# EAGLE board nes_adapter (EAGLE 7.6.0)
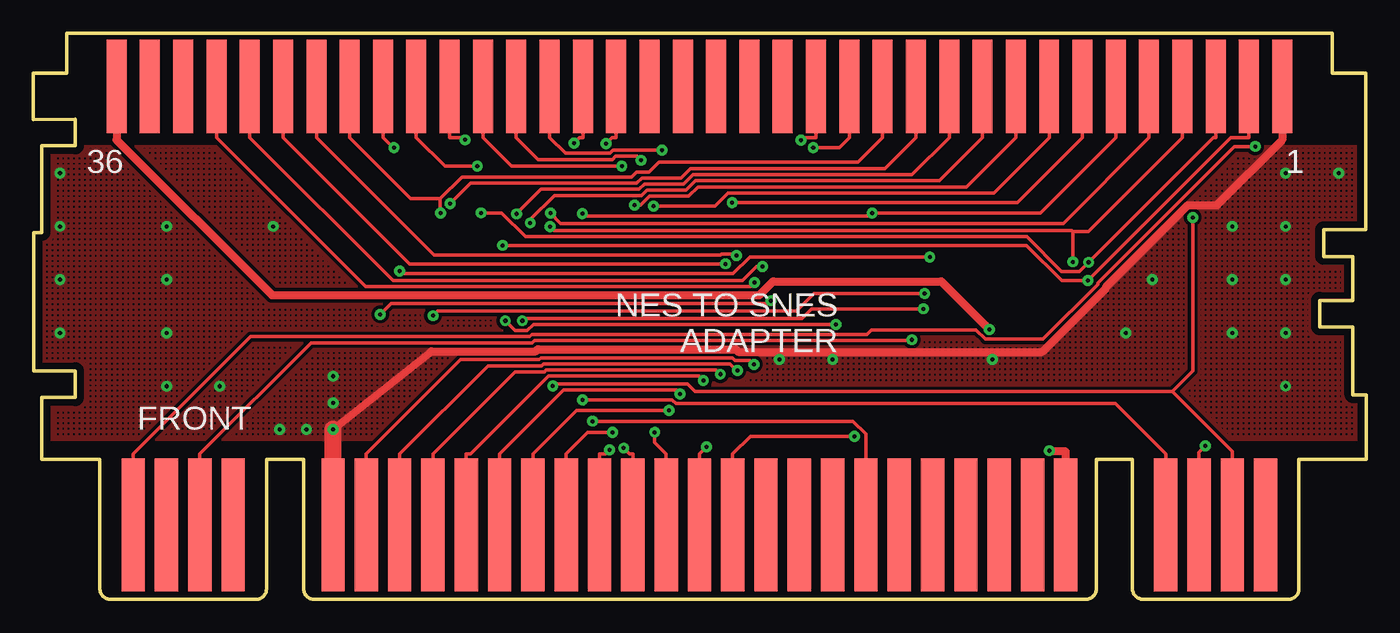
[diagram p0: board, top side]
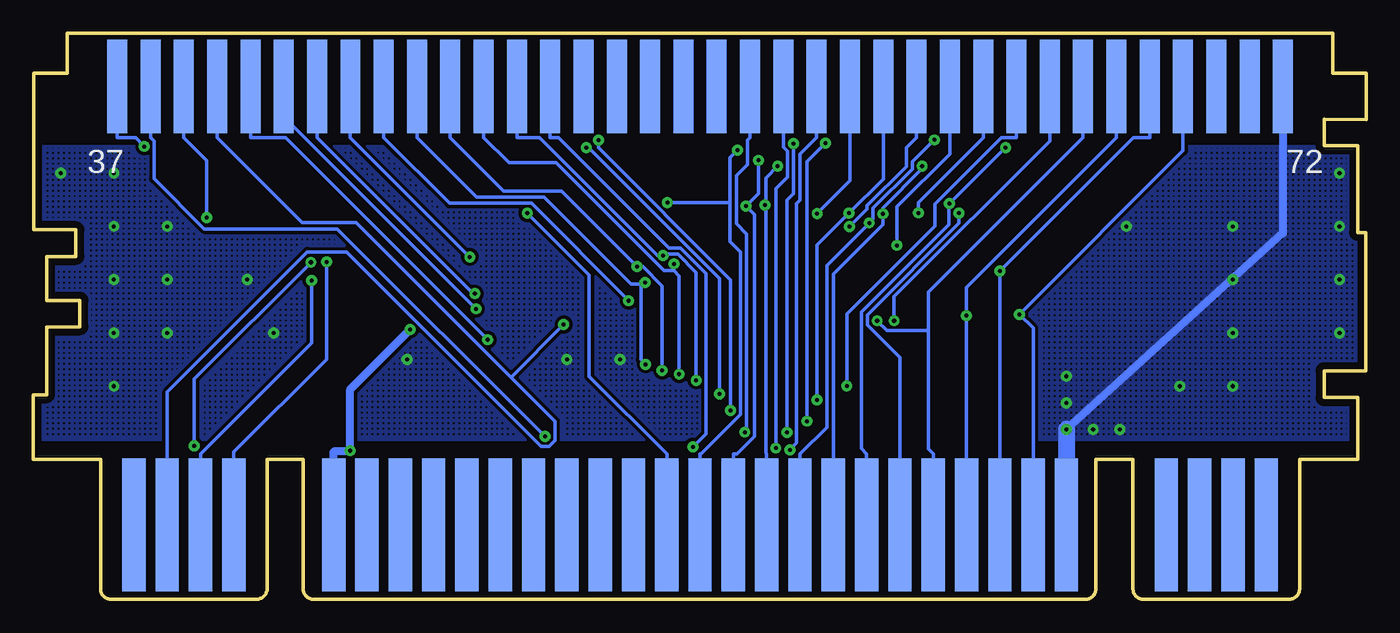
[diagram p1: board, bottom side, seen from below]

Size 100.05 x 42.5 mm. Coordinates in mm from the lower left corner, seen from the top.
Outline: 5,0.75 arc90 5.8,0 16.8,0 arc90 17.5,0.8 17.5,10.5 20.3,10.5 20.3,0.8 arc90 21,0 79,0 arc90 79.8,0.8 79.8,10.5 82.5,10.5 82.5,0.8 arc90 83.3,0 94.2,0 arc90 95,0.75 95,10.5 100.05,10.5 100.05,15.35 99.05,15.35 99.05,20.45 96.55,20.45 96.55,22.45 99.05,22.45 99.05,25.75 96.85,25.75 96.85,27.75 100,27.75 100,39.5 97.5,39.5 97.5,42.5 2.5,42.5 2.5,39.5 0,39.5 0,36 3.15,36.05 3.15,34.05 0.65,34.05 0.65,27.55 0.05,27.55 0.05,17.15 3.15,17.15 3.15,15.15 0.65,15.15 0.65,10.5 5,10.5 5,0.75
Copper layers (1*16): Top 0.035mm / dielectric 1.5mm / Bottom 0.035mm
Design rules "SparkFun_small": minimum track width 8mil, minimum drill 12mil, track to track 8mil, track to pad 8mil, pad to pad 8mil, via to via 8mil, smd to smd 8mil, copper to edge 20mil, drill to drill 12mil, minimum pad ring 12mil, minimum via ring 10mil, stop-mask expansion 4mil, vias tented up to drill 25mil, thermal gap 10mil
Net classes: 0 default: width 0.254 mm, drill 0.305 mm, clearance 0.203 mm; 1 power: width 0.61 mm, drill 0.406 mm, clearance 0.203 mm; 2 gnd: width 0.61 mm, drill 0.406 mm, clearance 0.203 mm; 3 power usb: width 0.61 mm, drill 0.406 mm, clearance 0.203 mm

## Footprints (pad centres in the part's own frame; a part is rotated, then mirrored left to right if it is on the bottom)
CART-EXP-PINS-LONG = smd 1.75 x 10 bottom: 1 42.5,-1.42; 2 40,-1.42; 3 37.5,-1.42; 4 35,-1.42; 5 27.5,-1.42; 6 25,-1.42; 7 22.5,-1.42; 8 20,-1.42; 9 17.5,-1.42; 10 15,-1.42; 11 12.5,-1.42; 12 10,-1.42; 13 7.5,-1.42; 14 5,-1.42; 15 2.5,-1.42; 16 0,-1.42; 17 -2.5,-1.42; 18 -5,-1.42; 19 -7.5,-1.42; 20 -10,-1.42; 21 -12.5,-1.42; 22 -15,-1.42; 23 -17.5,-1.42; 24 -20,-1.42; 25 -22.5,-1.42; 26 -25,-1.42; 27 -27.5,-1.42; 28 -35,-1.42; 29 -37.5,-1.42; 30 -40,-1.42; 31 -42.5,-1.42 | smd 1.75 x 10: 32 42.5,-1.42; 33 40,-1.42; 34 37.5,-1.42; 35 35,-1.42; 36 27.5,-1.42; 37 25,-1.42; 38 22.5,-1.42; 39 20,-1.42; 40 17.5,-1.42; 41 15,-1.42; 42 12.5,-1.42; 43 10,-1.42; 44 7.5,-1.42; 45 5,-1.42; 46 2.5,-1.42; 47 0,-1.42; 48 -2.5,-1.42; 49 -5,-1.42; 50 -7.5,-1.42; 51 -10,-1.42; 52 -12.5,-1.42; 53 -15,-1.42; 54 -17.5,-1.42; 55 -20,-1.42; 56 -22.5,-1.42; 57 -25,-1.42; 58 -27.5,-1.42; 59 -35,-1.42; 60 -37.5,-1.42; 61 -40,-1.42; 62 -42.5,-1.42
NES_PINS = smd 1.5 x 7: P1 43.75,-0.5; P2 41.25,-0.5; P3 38.75,-0.5; P4 36.25,-0.5; P5 33.75,-0.5; P6 31.25,-0.5; P7 28.75,-0.5; P8 26.25,-0.5; P9 23.75,-0.5; P10 21.25,-0.5; P11 18.75,-0.5; P12 16.25,-0.5; P13 13.75,-0.5; P14 11.25,-0.5; P15 8.75,-0.5; P16 6.25,-0.5; P17 3.75,-0.5; P18 1.25,-0.5; P19 -1.25,-0.5; P20 -3.75,-0.5; P21 -6.25,-0.5; P22 -8.75,-0.5; P23 -11.25,-0.5; P24 -13.75,-0.5; P25 -16.25,-0.5; P26 -18.75,-0.5; P27 -21.25,-0.5; P28 -23.75,-0.5; P29 -26.25,-0.5; P30 -28.75,-0.5; P31 -31.25,-0.5; P32 -33.75,-0.5; P33 -36.25,-0.5; P34 -38.75,-0.5; P35 -41.25,-0.5; P36 -43.75,-0.5 | smd 1.5 x 7 bottom: P37 43.75,-0.5; P38 41.25,-0.5; P39 38.75,-0.5; P40 36.25,-0.5; P41 33.75,-0.5; P42 31.25,-0.5; P43 28.75,-0.5; P44 26.25,-0.5; P45 23.75,-0.5; P46 21.25,-0.5; P47 18.75,-0.5; P48 16.25,-0.5; P49 13.75,-0.5; P50 11.25,-0.5; P51 8.75,-0.5; P52 6.25,-0.5; P53 3.75,-0.5; P54 1.25,-0.5; P55 -1.25,-0.5; P56 -3.75,-0.5; P57 -6.25,-0.5; P58 -8.75,-0.5; P59 -11.25,-0.5; P60 -13.75,-0.5; P61 -16.25,-0.5; P62 -18.75,-0.5; P63 -21.25,-0.5; P64 -23.75,-0.5; P65 -26.25,-0.5; P66 -28.75,-0.5; P67 -31.25,-0.5; P68 -33.75,-0.5; P69 -36.25,-0.5; P70 -38.75,-0.5; P71 -41.25,-0.5; P72 -43.75,-0.5

## Placement (x,y rotation side)
U$1  CART-EXP-EDGE  [CART-EXP-PINS-LONG]  50,7 0 bottom
U$2  NES-CART_PINS  [NES_PINS]  50,39 0 top

## Library data of the parts
U$1 = snes_cart_mod4
U$2 = !sanni_mod4

## Nets
!CHR_A13: U$1.13 U$2.P58
A0: U$1.41 U$2.P13 U$2.P29
A1: U$1.42 U$2.P12 U$2.P28
A2: U$1.43 U$2.P11 U$2.P27
A3: U$1.44 U$2.P10 U$2.P26
A4: U$1.45 U$2.P9 U$2.P25
A5: U$1.46 U$2.P8 U$2.P24
A6: U$1.47 U$2.P7 U$2.P23
A7: U$1.48 U$2.P6 U$2.P59
A8: U$1.28 U$2.P5 U$2.P60
A9: U$1.59 U$2.P4 U$2.P61
A10: U$1.29 U$2.P3 U$2.P63
A11: U$1.60 U$2.P2 U$2.P62
A12: U$1.30 U$2.P39 U$2.P64
A13: U$1.61 U$2.P40 U$2.P65
A14: U$1.3 U$2.P41
CHR_RD: U$1.12 U$2.P21
CHR_WR: U$1.15 U$2.P56
CIRAM_A10: U$1.21 U$2.P22
CIRAM_CE: U$1.14 U$2.P57
CLK: U$1.1 U$2.P37
D0: U$1.9 U$2.P30 U$2.P49
D1: U$1.8 U$2.P31 U$2.P48
D2: U$1.7 U$2.P32 U$2.P47
D3: U$1.6 U$2.P33 U$2.P46
D4: U$1.37 U$2.P45 U$2.P69
D5: U$1.38 U$2.P44 U$2.P68
D6: U$1.39 U$2.P43 U$2.P67
D7: U$1.40 U$2.P42 U$2.P66
GND [gnd]: U$1.5 U$1.36 U$2.P1 U$2.P72
IRQ: U$1.11 U$2.P15
M2: U$1.17 U$2.P38
PRG_CE: U$1.16 U$2.P50
PRG_RW: U$1.10 U$2.P14
VCC [power]: U$1.27 U$1.58 U$2.P36

## Tracks (layer width: path | path; a pad name or v marks a point on that pad's centre or on a via)
!CHR_A13  (via drill 0.3 pad 0.81)
  Top 0.254: U$1.13 42.5,10.91 42.95,10.91 v43.27,11.22
  Bottom 0.254: v43.27,11.22 42.75,11.74 42.75,29.73 42.5,29.98 42.5,33.42 41.25,34.67 U$2.P58
A0  (via drill 0.3 pad 0.81)
  Top 0.254: U$2.P29 23.75,34.67 28.34,30.08 30.55,30.08 | 30.55,30.08 32.17,31.7 44.9,31.7 45.29,32.09 46.22,32.09 46.96,32.83 61.91,32.83 63.75,34.67 U$2.P13 | 30.55,30.08 30.55,29.01 v30.56,29
  Bottom 0.254: U$1.41 35,18.16 37.44,20.61 37.44,21.36 30.56,28.25 v30.56,29 | v30.56,29
A1  (via drill 0.3 pad 0.81)
  Top 0.254: v31.29,29.71 32.82,31.24 45.29,31.24 45.68,31.63 48.62,31.63 49.34,32.34 63.92,32.34 66.25,34.67 U$2.P12 | v27.07,33.91 27,33.91 26.25,34.67 U$2.P28
  Bottom 0.254: v27.07,33.91 31.27,29.71 v31.29,29.71 31.31,29.69 31.31,28.15 37.9,21.55 37.9,11.31 37.5,10.91 U$1.42
A2  (via drill 0.3 pad 0.81)
  Top 0.254: U$2.P27 28.75,34.67 30.9,32.52 v33.33,32.52 | v36.27,28.94 38.11,30.79 45.48,30.79 45.87,31.17 48.81,31.17 49.52,31.88 65.96,31.88 68.75,34.67 U$2.P11
  Bottom 0.254: v33.33,32.52 33.33,32.32 36.27,29.38 v36.27,28.94 36.27,28.14 40,24.41 40,10.91 U$1.43
A3  (via drill 0.3 pad 0.81)
  Top 0.254: v37.3,28.26 37.3,28.51 39.12,30.33 45.67,30.33 46.05,30.71 49,30.71 49.72,31.43 68.01,31.43 71.25,34.67 U$2.P10 | v32.42,34.5 32.25,34.67 31.25,34.67 U$2.P26
  Bottom 0.254: v32.42,34.5 34.07,32.85 34.07,32.3 37.01,29.36 37.01,28.56 v37.3,28.26 40.49,25.07 40.49,12.92 42.5,10.91 U$1.44
A4  (via drill 0.3 pad 0.81)
  Top 0.254: v45.13,29.59 45.58,29.59 46.24,30.26 49.19,30.26 49.9,30.97 70.05,30.97 73.75,34.67 U$2.P9 | v44.18,32.52 35.9,32.52 33.75,34.67 U$2.P25
  Bottom 0.254: 45.06,29.59 45.06,31.63 v44.18,32.52 | 45.06,29.59 v45.13,29.59 | 45.06,29.59 45.06,10.97 45,10.91 U$1.45
A5  (via drill 0.3 pad 0.81)
  Top 0.254: v46.55,29.52 51.16,29.52 52.16,30.51 72.09,30.51 76.25,34.67 U$2.P8 | v45.62,32.96 45.33,33.26 43.71,33.26 43.48,33.03 37.89,33.03 36.25,34.67 U$2.P24
  Bottom 0.254: v45.62,32.96 45.62,30.45 v46.55,29.52 45.91,28.88 45.91,12.24 47.24,10.91 47.5,10.91 U$1.46
A6  (via drill 0.3 pad 0.81)
  Top 0.254: U$2.P7 78.75,34.67 73.86,29.77 v52.46,29.77 | U$2.P23 38.75,34.67 39.94,33.48 43.29,33.48 43.53,33.72 v47.19,33.72
  Bottom 0.254: 47.75,29.77 47.75,33.16 v47.19,33.72 | 47.75,29.77 47.75,26.86 46.97,26.08 46.97,13.87 49.93,10.91 50,10.91 U$1.47 | 47.75,29.77 v52.46,29.77
A7  (via drill 0.3 pad 0.81)
  Top 0.254: v41.21,28.97 41.4,28.78 62.75,28.78 v62.97,29 75.58,29 81.25,34.67 U$2.P6
  Bottom 0.254: v62.97,29 58.32,24.35 58.32,16.73 52.5,10.91 U$1.48 | v41.21,28.97 38.75,31.43 38.75,34.67 U$2.P59
A8  (via drill 0.3 pad 0.81)
  Top 0.254: v38.82,28.99 39.59,28.23 77.31,28.23 83.75,34.67 U$2.P5 | v41.23,14.97 47.96,14.97 48.24,14.69 81.22,14.69 85,10.91 U$1.28
  Bottom 0.254: U$2.P60 36.25,31.56 v38.82,28.99 41.23,26.59 v41.23,14.97
A9  (via drill 0.3 pad 0.81)
  Top 0.254: v38.79,27.98 39.09,27.68 77.97,27.68 78.04,27.6 | 78.04,27.6 79.18,27.6 86.25,34.67 U$2.P4 | 78.04,27.6 v78.04,25.34
  Bottom 0.254: v38.79,27.98 37.47,29.3 37.47,29.55 34.52,32.49 34.52,33.9 33.75,34.67 U$2.P61 | v78.04,25.34 78.04,18.02 85,11.06 U$1.59
A10  (via drill 0.3 pad 0.81)
  Top 0.254: v33.62,29.01 35.16,29.01 36.95,27.22 74.56,27.22 77.19,24.59 78.51,24.59 v79.21,25.3 88.58,34.67 88.75,34.67 U$2.P3 | v87.98,11.52 87.5,11.04 U$1.29
  Bottom 0.254: v33.62,29.01 33.62,29.8 28.75,34.67 U$2.P63 | v79.21,25.3 87.98,16.54 v87.98,11.52
A11  (via drill 0.3 pad 0.81)
  Top 0.254: v35.21,26.58 74.56,26.58 77.19,23.94 v79.17,23.94 89.9,34.67 91.25,34.67 U$2.P2
  Bottom 0.254: v35.21,26.58 35.21,29.47 31.25,33.43 31.25,34.67 U$2.P62 | v79.17,23.94 79.17,19.24 87.5,10.91 U$1.60
A12  (via drill 0.3 pad 0.81)
  Top 0.254: 85.5,15.6 87.03,17.13 v87.03,28.67 | v87.03,28.67 | 85.5,15.6 90,11.1 90,10.91 U$1.30 | v38.99,16.02 39.13,16.16 49.12,16.16 49.68,15.6 85.5,15.6
  Bottom 0.254: U$2.P64 26.25,34.67 27.38,34.67 32.38,29.66 32.38,28.04 38.99,21.43 v38.99,16.02 | v87.03,28.67 87.03,32.95 88.75,34.67 U$2.P39
A13  (via drill 0.3 pad 0.81)
  Top 0.254: v60.24,20.63 37.53,20.63 37.08,20.18 36.17,20.18 v35.43,20.91
  Bottom 0.254: U$1.61 90,15.56 79.49,26.07 76.52,26.07 69.46,19.01 61.94,11.49 61.33,11.49 60.9,11.92 60.9,13.37 64.2,16.67 | 64.2,16.67 v60.24,20.63 | v35.43,20.91 35.43,22.73 23.75,34.41 23.75,34.67 U$2.P65 | 64.2,16.67 75.8,28.27 79.85,28.27 86.25,34.67 U$2.P40
A14  (via drill 0.3 pad 0.81)
  Top 0.254: v65.94,19.49 65.88,19.43 37.62,19.43 37.45,19.26 20.85,19.26 12.5,10.91 U$1.3
  Bottom 0.254: v65.94,19.49 81.12,34.67 83.75,34.67 U$2.P41
CHR_RD  (via drill 0.3 pad 0.81)
  Top 0.254: v42.99,34.22 43.44,34.67 43.75,34.67 U$2.P21 | U$1.12 40,10.91 41.61,12.52 v43.48,12.52
  Bottom 0.254: v43.48,12.52 43.48,29.96 42.98,30.46 v42.98,34.22 v42.99,34.22
CHR_WR  (via drill 0.3 pad 0.81)
  Top 0.254: U$1.15 47.5,10.91 46.65,11.77 v46.65,12.54
  Bottom 0.254: v46.65,12.54 46.51,12.68 46.51,27.42 47.29,28.2 47.29,31.81 46.46,32.64 46.46,34.46 46.25,34.67 U$2.P56
CIRAM_A10  (via drill 0.3 pad 0.81)
  Top 0.254: v41.98,13.37 61.53,13.37 62.5,12.4 62.5,10.91 U$1.21 | U$2.P22 41.25,34.67 41.01,34.67 v40.59,34.26
  Bottom 0.254: v41.98,13.37 41.98,32.87 v40.59,34.26
CIRAM_CE  (via drill 0.3 pad 0.81)
  Top 0.254: v44.32,11.35 44.76,10.91 45,10.91 U$1.14
  Bottom 0.254: v44.32,11.35 44.32,30.83 43.44,31.7 43.44,33.63 43.75,33.94 43.75,34.67 U$2.P57
CLK  (via drill 0.3 pad 0.81)
  Top 0.254: v91.72,34 90.17,34 79.9,23.74 79.9,23.64 75.8,19.53 71.45,19.53 70.75,20.23 62.89,20.23 62.56,19.89 37.44,19.89 37.26,19.72 16.31,19.72 7.5,10.91 U$1.1
  Bottom 0.254: U$2.P37 93.75,34.67 92.38,34.67 v91.72,34
D0  (via drill 0.3 pad 0.81)
  Top 0.254: v50.29,16.44 49.97,16.75 38.69,16.75 32.84,10.91 32.5,10.91 U$1.9 | v52.79,25.8 52.67,25.92 51.66,25.92 51.58,25.84 30.08,25.84 21.25,34.67 U$2.P30
  Bottom 0.254: v50.29,16.44 50.29,24.55 51.66,25.92 52.67,25.92 v52.79,25.8 53.19,25.8 62.06,34.67 63.75,34.67 U$2.P49
D1  (via drill 0.3 pad 0.81)
  Top 0.254: v51.57,16.9 51.26,17.21 38.5,17.21 38.36,17.07 36.16,17.07 30,10.91 U$1.8 | v51.97,25.19 28.23,25.19 18.75,34.67 U$2.P31
  Bottom 0.254: 51.98,24.68 51.57,24.27 v51.57,16.9 | 51.98,24.68 51.97,24.68 v51.97,25.19 | 51.98,24.68 52.71,24.68 60.81,32.77 64.36,32.77 66.25,34.67 U$2.P48
D2  (via drill 0.3 pad 0.81)
  Top 0.254: v52.85,17.18 52.77,17.18 52.28,17.67 38.31,17.67 38.17,17.53 34.12,17.53 27.5,10.91 U$1.7 | v54.73,24.97 54.3,24.97 53.25,23.92 27,23.92 16.25,34.67 U$2.P32
  Bottom 0.254: v52.85,17.18 52.85,23.52 54.3,24.97 v54.73,24.97 60.41,30.65 64.73,30.65 68.75,34.67 U$2.P47
D3  (via drill 0.3 pad 0.81)
  Top 0.254: v54.09,17.64 53.8,17.93 52.67,17.93 52.47,18.13 38.12,18.13 37.98,17.99 32.08,17.99 25,10.91 U$1.6 | v54.14,23.77 53.83,23.46 24.95,23.46 13.75,34.67 U$2.P33
  Bottom 0.254: 54.45,23.67 54.34,23.77 v54.14,23.77 | 54.45,23.67 55.18,23.67 61.71,30.2 66.78,30.2 71.25,34.67 U$2.P46 | 54.45,23.67 54.45,18 v54.09,17.64
D4  (via drill 0.3 pad 0.81)
  Top 0.254: v26.04,21.39 26.84,22.2 55.15,22.2 v55.37,22.41
  Bottom 0.254: v55.37,22.41 55.37,22.45 62.66,29.74 68.82,29.74 73.75,34.67 U$2.P45 | U$2.P69 13.75,33.68 v26.04,21.39 25,20.35 25,10.91 U$1.37
D5  (via drill 0.3 pad 0.81)
  Top 0.254: v27.5,24.66 27.71,24.45 52.52,24.45 53.79,25.71 v67.29,25.71
  Bottom 0.254: v67.29,25.71 76.25,34.67 U$2.P44 | U$2.P68 16.25,34.67 17.49,34.67 v27.5,24.66 27.5,10.91 U$1.38
D6  (via drill 0.3 pad 0.81)
  Top 0.254: v30,21.29 30.36,21.65 57.28,21.65 58.58,22.95 v66.91,22.95
  Bottom 0.254: v66.91,22.95 67.03,22.95 78.75,34.67 U$2.P43 | U$1.39 30,10.91 v30,21.29 30,23.42 18.75,34.67 U$2.P67
D7  (via drill 0.3 pad 0.81)
  Top 0.254: v66.82,21.81 58.41,21.81 57.69,21.09 36.88,21.09 v36.71,20.91
  Bottom 0.254: 32.86,20.18 32.86,23.06 21.25,34.67 U$2.P66 | 32.86,20.18 32.86,11.27 32.5,10.91 U$1.40 | 32.86,20.18 35.97,20.18 v36.71,20.91 | U$2.P42 81.25,36.23 v66.82,21.81
GND  (via drill 0.3 pad 0.81)
  Top 0.61: v22.5,12.76 29.88,18.62 37.72,18.62 37.86,18.77 52.73,18.77 52.92,18.57 75.74,18.57 80.54,23.37 80.54,23.48 86.65,29.59 88.84,29.59 93.75,34.49 U$2.P1
  Top 1.27: v22.5,12.76 22.5,11.09 U$1.5
  Bottom 0.61: U$2.P72 6.25,27.49 v22.5,12.76
  Bottom 1.27: v22.5,12.76 U$1.5
  other vias: 56,18 60,18 72,18 82,20 84,24 90,20 94,16 94,20 90,24 94,24 90,28 94,28 98,32 2,32 2,28 2,24 2,20 10,24 10,20 10,16 14,16 18,28 10,28 18.5,12.75 20.5,12.75 22.5,14.75 22.5,16.75 94,32
  pour Bottom (isolate 0.254, hatched): 0,34 100,34 100,12 0,12
  pour Top (isolate 0.254, hatched): 0,34 100,34 100,12 0,12
IRQ  (via drill 0.3 pad 0.81)
  Top 0.254: v47.71,14.18 40.77,14.18 37.5,10.91 U$1.11 | v57.63,34.48 57.83,34.67 58.75,34.67 U$2.P15
  Bottom 0.254: v47.71,14.18 47.71,23.98 57.63,33.9 v57.63,34.48
M2  (via drill 0.3 pad 0.81)
  Top 0.254: U$1.17 52.5,10.91 53.81,12.22 v61.64,12.22
  Bottom 0.254: U$2.P38 91.25,34.67 90.98,34.4 90.98,31.58 87.22,27.82 77.23,27.82 v61.64,12.22
PRG_CE  (via drill 0.3 pad 0.81)
  Top 0.254: v50.54,11.45 50,10.91 U$1.16
  Bottom 0.254: v50.54,11.45 49.56,12.43 49.56,24.46 51.48,26.38 52.33,26.38 60.62,34.67 61.25,34.67 U$2.P50
PRG_RW  (via drill 0.3 pad 0.81)
  Top 0.254: v48.55,15.42 48.27,15.7 39.79,15.7 35,10.91 U$1.10 | v58.54,33.92 60.5,33.92 61.25,34.67 U$2.P14
  Bottom 0.254: v58.54,33.92 58.37,33.92 48.55,24.1 v48.55,15.42
VCC  (via drill 0.3 pad 0.81)
  Top 0.61: v71.76,20.27 68.16,23.87 55.53,23.87 54.49,22.83 17.91,22.83 6.25,34.49 U$2.P36 | v76.27,11.16 76.34,11.09 77.5,11.09 U$1.58
  Bottom 0.61: v71.76,20.27 76.27,15.76 v76.27,11.16 76.34,11.09 77.5,11.09 U$1.58

## Text on the board
tNames: 36 | 1 | NES TO SNES / ADAPTER | FRONT
bNames: 72 | 37